# Altium PCB Pannelisation_janvier2018.PcbDoc (part 2 of 3)
Units mil, origin at the board's own origin, x right, y up, seen from the top; angles counter-clockwise.
Board outline 6785 x 5025 mil, 2 copper layers (Top Layer, Bottom Layer); 423 components, 0 nets, 1281 pads, 340 vias.
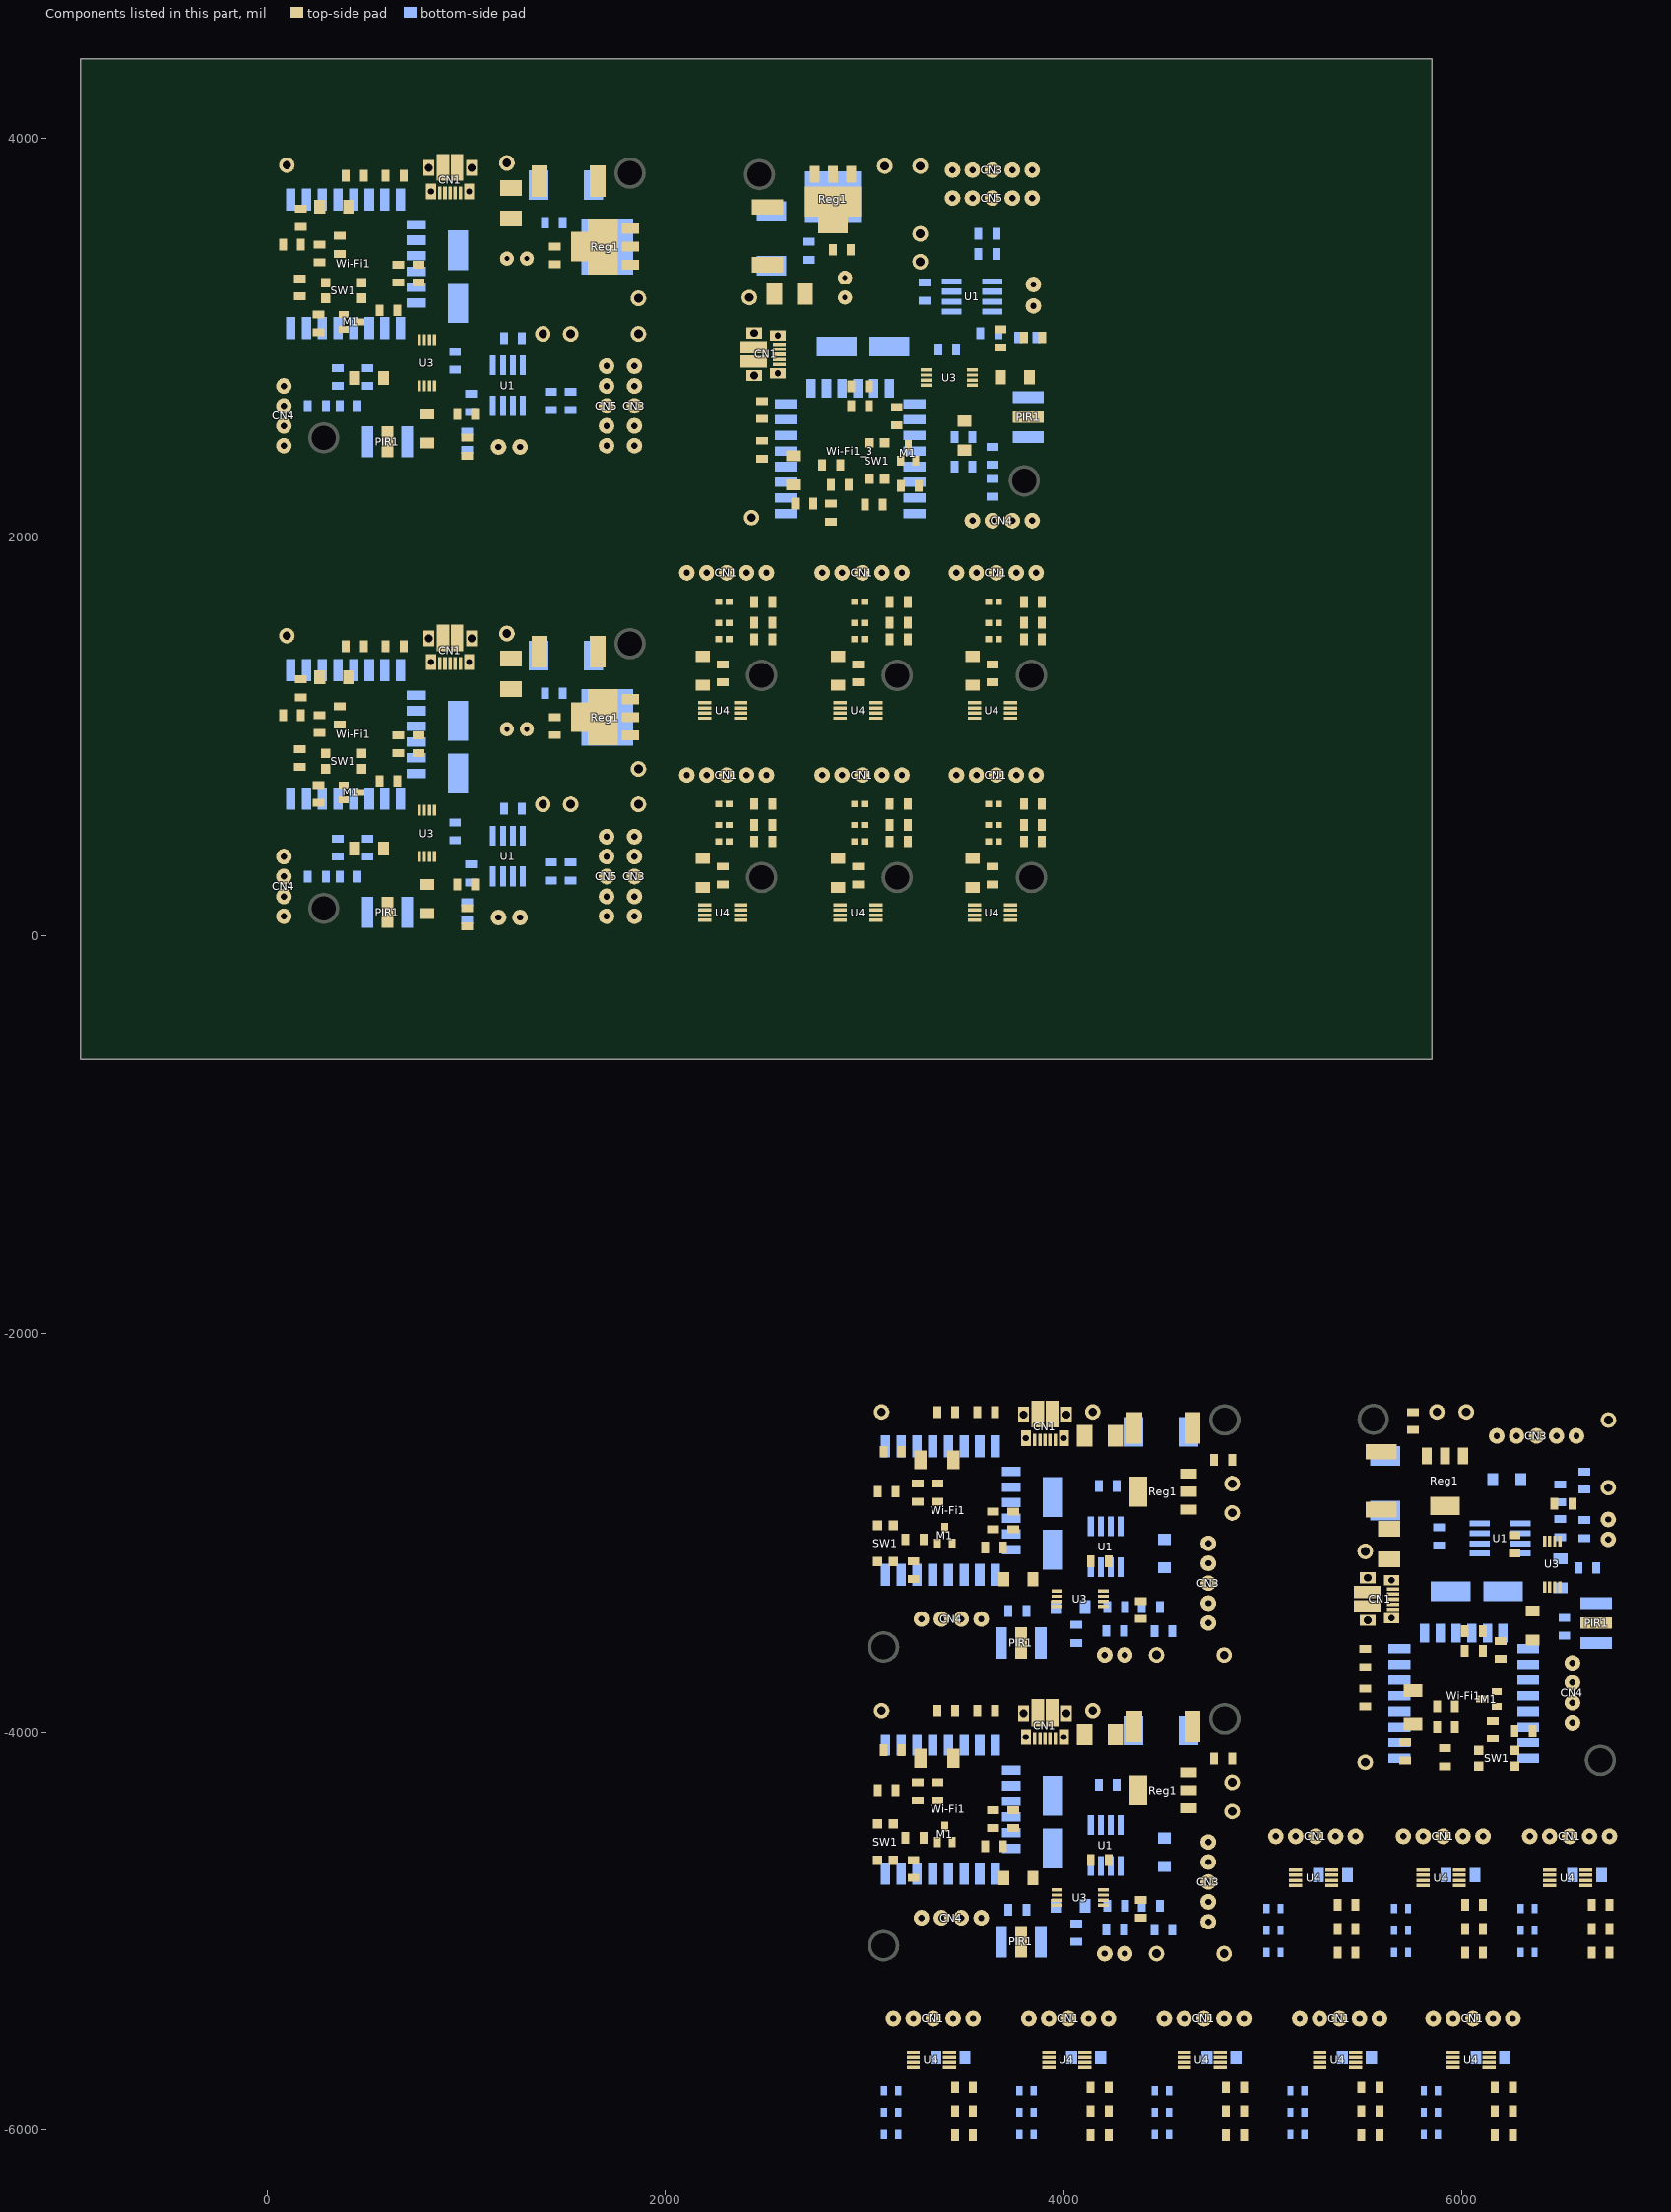
[diagram p2: the components of this part, seen from the top]

## Via types
v1: diameter 40, hole 18, Top Layer to Bottom Layer, 167 vias
v2: diameter 50, hole 24, Top Layer to Bottom Layer, 107 vias
v3: diameter 39.37, hole 15.75, Top Layer to Bottom Layer, 48 vias
v4: diameter 60, hole 32, Top Layer to Bottom Layer, 18 vias

## Nets (pads, with @x,y where several pads share a name; then routed paths per layer and width w, separated by ;. In a path a pad name is that pad's centre, name@x,y a point inside that pad or via, vN(x,y) a via of type N, cw(c..) or ccw(c..) an arc to the next point about the centre after c; other vN are vias at no path point) (continued)
copper on no net: | length 232859
  Top Layer w10: 170,1104 171,1105 ; 170,3467 171,3468 ; 486,1442 486,1452 486,1462 ; 486,3805 486,3815 486,3825 ; 1333.2,1388.54 1368.66,1424 ; 1333.2,3751.54 1368.66,3787 ; 1660,1424 1662.09,1421.91 ; 1660,3787 1662.09,3784.91 ; 2475,2483 2485,2483 2495,2483 ; 2513,3365.66 2548.46,3330.2 ; 2513,3657 2515.09,3659.09 ; 2832,2168 2833,2167 ; 3244.77,-5687 3245,-5686.77 ; 3266,-4148.65 3280.65,-4134 ; 3266,-2648.65 3280.65,-2634 ; 3366,-3894 3366,-3868 ; 3366,-2394 3366,-2368 ; 3455,-5795 3455,-5785 ; 3456,-3904 3456,-3894 3456,-3884 ; 3456,-2404 3456,-2394 3456,-2384 ; 3535,-6025 3535,-6020 ; 3924.77,-5687 3925,-5686.77 ; 4135,-5795 4135,-5785 ; 4215,-6025 4215,-6020 ; 4604.77,-5687 4605,-5686.77 ; 4646,-3974 4648.09,-3976.09 ; 4646,-2474 4648.09,-2476.09 ; 4815,-5795 4815,-5785 ; 4895,-6025 4895,-6020 ; 5164.77,-4772 5165,-4771.77 ; 5284.77,-5687 5285,-5686.77 ; 5375,-4880 5375,-4870 ; 5455,-5110 5455,-5105 ; 5488,-3874 5514,-3874 ; 5495,-5795 5495,-5785 ; 5504,-3784 5514,-3784 5524,-3784 ; 5575,-6025 5575,-6020 ; 5594,-2594 5596.09,-2591.91 ; 5754,-3959.35 5768.65,-3974 ; 5804.77,-4772 5805,-4771.77 ; 5954.77,-5687 5955,-5686.77 ; 6015,-4880 6015,-4870 ; 6095,-5110 6095,-5105 ; 6165,-5795 6165,-5785 ; 6245,-6025 6245,-6020 ; 6439.77,-4772 6440,-4771.77 ; 6650,-4880 6650,-4870 ; 6730,-5110 6730,-5105
  Top Layer w15: 582,992 582,871 610,843 610,723.12 630.12,703 743,703 765,681 765,627.28 ; 582,3355 582,3234 610,3206 610,3086.12 630.12,3066 743,3066 765,3044 765,2990.28 ; 790.59,395 790.59,343.41 811,323 v1(897,323) ; 790.59,627.28 790.59,693.59 818,721 983,721 1018,686 1086,686 1118,718 1118,791 ; 790.59,2758 790.59,2706.41 811,2686 v1(897,2686) ; 790.59,2990.28 790.59,3056.59 818,3084 983,3084 1018,3049 1086,3049 1118,3081 1118,3154 ; 816.18,395 v1@816.18,476.18 ; 816.18,2758 v1@816.18,2839.18 ; 955,255 955,265 ; 955,2618 955,2628 ; v2(2081,41) 2141,41 2175.23,75.23 2198,75.23 ; v2(2081,1056) 2141,1056 2175.23,1090.23 2198,1090.23 ; 2108,805 2108,709 2058,659 2058,146 2103.18,100.82 2198,100.82 ; 2108,1820 2108,1724 2058,1674 2058,1161 2103.18,1115.82 2198,1115.82 ; 2146.62,153.56 2126,174.19 2126,603 2149,626 v1(2184,626) ; 2146.62,1168.56 2126,1189.19 2126,1618 2149,1641 v1(2184,1641) ; 2148,152 2198,152 ; 2148,1167 2198,1167 ; 2198,126.41 2126.59,126.41 2092,161 2092,628 2197,733 2236,733 2308,805 ; 2198,1141.41 2126.59,1141.41 2092,1176 2092,1643 2197,1748 2236,1748 2308,1820 ; v1(2287,200) 2287,94 2305.77,75.23 2379.1,75.23 ; v1(2287,404) 2320.67,437.67 2320.67,471 ; v1(2287,1215) 2287,1109 2305.77,1090.23 2379.1,1090.23 ; v1(2287,1419) 2320.67,1452.67 2320.67,1486 ; 2379.1,100.82 2424.18,100.82 v1(2465,60) ; 2379.1,126.41 2486.59,126.41 v1(2505,108) ; 2379.1,1115.82 2424.18,1115.82 v1(2465,1075) ; 2379.1,1141.41 2486.59,1141.41 v1(2505,1123) ; v2(2761,41) 2821,41 2855.23,75.23 2878,75.23 ; v2(2761,1056) 2821,1056 2855.23,1090.23 2878,1090.23 ; 2788,805 2788,709 2738,659 2738,146 2783.18,100.82 2878,100.82 ; 2788,1820 2788,1724 2738,1674 2738,1161 2783.18,1115.82 2878,1115.82 ; 2826.62,153.56 2806,174.19 2806,603 2829,626 v1(2864,626) ; 2826.62,1168.56 2806,1189.19 2806,1618 2829,1641 v1(2864,1641) ; 2828,152 2878,152 ; 2828,1167 2878,1167 ; 2878,126.41 2806.59,126.41 2772,161 2772,628 2877,733 2916,733 2988,805 ; 2878,1141.41 2806.59,1141.41 2772,1176 2772,1643 2877,1748 2916,1748 2988,1820 ; 2945,2579 3066,2579 3094,2607 3213.88,2607 3234,2627.12 3234,2740 3256,2762 3309.72,2762 ; v1(2967,200) 2967,94 2985.77,75.23 3059.1,75.23 ; v1(2967,404) 3000.67,437.67 3000.67,471 ; v1(2967,1215) 2967,1109 2985.77,1090.23 3059.1,1090.23 ; v1(2967,1419) 3000.67,1452.67 3000.67,1486 ; 3059.1,100.82 3104.18,100.82 v1(3145,60) ; 3059.1,126.41 3166.59,126.41 v1(3185,108) ; 3059.1,1115.82 3104.18,1115.82 v1(3145,1075) ; 3059.1,1141.41 3166.59,1141.41 v1(3185,1123) ; v2(3099,-5687) 3244.77,-5687 ; 3145,-5440 3145,-5625 3181.18,-5661.18 3245,-5661.18 ; 3146,3115 3219,3115 3251,3083 3251,3015 3216,2980 3216,2815 3243.41,2787.59 3309.72,2787.59 ; 3161,-4299 3321,-4299 3366,-4254 ; 3161,-2799 3321,-2799 3366,-2754 ; 3245,-5635.59 3319.41,-5635.59 3345,-5610 3345,-5440 ; v1(3370,-5840) 3330,-5800 3330,-5695 3363.82,-5661.18 3426.1,-5661.18 ; v1(3385,-5760) 3385,-5705 3400,-5690 ; 3426.1,-5635.59 3480.59,-5635.59 3500,-5655 3500,-5850 3455,-5895 ; 3426.1,-5610 3533,-5610 ; v2(3435,41) 3495,41 3529.23,75.23 3552,75.23 ; v2(3435,1056) 3495,1056 3529.23,1090.23 3552,1090.23 ; 3446,-4134 3446,-4121 ; 3446,-2634 3446,-2621 ; v1@3460.82,2813.18 3542,2813.18 ; 3462,805 3462,709 3412,659 3412,146 3457.18,100.82 3552,100.82 ; 3462,1820 3462,1724 3412,1674 3412,1161 3457.18,1115.82 3552,1115.82 ; 3500.62,153.56 3480,174.19 3480,603 3503,626 v1(3538,626) ; 3500.62,1168.56 3480,1189.19 3480,1618 3503,1641 v1(3538,1641) ; 3502,152 3552,152 ; 3502,1167 3552,1167 ; 3542,2787.59 3593.59,2787.59 3614,2808 v1(3614,2894) ; 3552,126.41 3480.59,126.41 3446,161 3446,628 3551,733 3590,733 3662,805 ; 3552,1141.41 3480.59,1141.41 3446,1176 3446,1643 3551,1748 3590,1748 3662,1820 ; v1(3641,200) 3641,94 3659.77,75.23 3733.1,75.23 ; v1(3641,404) 3674.67,437.67 3674.67,471 ; v1(3641,1215) 3641,1109 3659.77,1090.23 3733.1,1090.23 ; v1(3641,1419) 3674.67,1452.67 3674.67,1486 ; 3672,2952 3682,2952 ; 3733.1,100.82 3778.18,100.82 v1(3819,60) ; 3733.1,126.41 3840.59,126.41 v1(3859,108) ; 3733.1,1115.82 3778.18,1115.82 v1(3819,1075) ; 3733.1,1141.41 3840.59,1141.41 v1(3859,1123) ; v2(3779,-5687) 3924.77,-5687 ; 3825,-5440 3825,-5625 3861.18,-5661.18 3925,-5661.18 ; v1@3898.59,-4819.59 3966,-4819.59 ; v1@3898.59,-3319.59 3966,-3319.59 ; 3925,-5635.59 3999.41,-5635.59 4025,-5610 4025,-5440 ; 3966,-4845.18 4058,-4845.18 ; 3966,-3345.18 4058,-3345.18 ; v1(4050,-5840) 4010,-5800 4010,-5695 4043.82,-5661.18 4106.1,-5661.18 ; v1(4058,-4638) 4130,-4638 ; v1(4058,-3138) 4130,-3138 ; v1(4065,-5760) 4065,-5705 4080,-5690 ; 4106.1,-5635.59 4160.59,-5635.59 4180,-5655 4180,-5850 4135,-5895 ; 4106.1,-5610 4213,-5610 ; v1@4151,-4941 v1@4156,-4936 ; v1@4151,-3441 v1@4156,-3436 ; v1@4160,-4932 v1@4156,-4936 ; v1@4160,-3432 v1@4156,-3436 ; v1@4161.5,-4941.5 v1@4156,-4936 ; v1@4161.5,-3441.5 v1@4156,-3436 ; v1(4162,-4941) 4120,-4899 4120,-4867 4141.82,-4845.18 4198.28,-4845.18 ; v1(4162,-3441) 4120,-3399 4120,-3367 4141.82,-3345.18 4198.28,-3345.18 ; 4198.28,-4819.59 4272.41,-4819.59 4496,-4596 ; 4198.28,-4794 4251,-4794 4412,-4633 v1(4412,-4598) ; 4198.28,-3319.59 4272.41,-3319.59 4496,-3096 ; 4198.28,-3294 4251,-3294 4412,-3133 v1(4412,-3098) ; v1(4381,-4994) 4381,-4939 ; v1(4381,-3494) 4381,-3439 ; v2(4459,-5687) 4604.77,-5687 ; 4505,-5440 4505,-5625 4541.18,-5661.18 4605,-5661.18 ; 4605,-5635.59 4679.41,-5635.59 4705,-5610 4705,-5440 ; v1(4730,-5840) 4690,-5800 4690,-5695 4723.82,-5661.18 4786.1,-5661.18 ; v1(4745,-5760) 4745,-5705 4760,-5690 ; 4786.1,-5635.59 4840.59,-5635.59 4860,-5655 4860,-5850 4815,-5895 ; 4786.1,-5610 4893,-5610 ; v2(5019,-4772) 5164.77,-4772 ; 5065,-4525 5065,-4710 5101.18,-4746.18 5165,-4746.18 ; v2(5139,-5687) 5284.77,-5687 ; 5165,-4720.59 5239.41,-4720.59 5265,-4695 5265,-4525 ; 5185,-5440 5185,-5625 5221.18,-5661.18 5285,-5661.18 ; 5285,-5635.59 5359.41,-5635.59 5385,-5610 5385,-5440 ; v1(5290,-4925) 5250,-4885 5250,-4780 5283.82,-4746.18 5346.1,-4746.18 ; v1(5305,-4845) 5305,-4790 5320,-4775 ; 5346.1,-4720.59 5400.59,-4720.59 5420,-4740 5420,-4935 5375,-4980 ; 5346.1,-4695 5453,-4695 ; v1(5410,-5840) 5370,-5800 5370,-5695 5403.82,-5661.18 5466.1,-5661.18 ; v1(5425,-5760) 5425,-5705 5440,-5690 ; 5466.1,-5635.59 5520.59,-5635.59 5540,-5655 5540,-5850 5495,-5895 ; 5466.1,-5610 5573,-5610 ; v2(5659,-4772) 5804.77,-4772 ; 5705,-4525 5705,-4710 5741.18,-4746.18 5805,-4746.18 ; 5741,-3794 5754,-3794 ; 5805,-4720.59 5879.41,-4720.59 5905,-4695 5905,-4525 ; v2(5809,-5687) 5954.77,-5687 ; 5855,-5440 5855,-5625 5891.18,-5661.18 5955,-5661.18 ; 5874,-3874 5919,-3919 5919,-4079 ; v1(5930,-4925) 5890,-4885 5890,-4780 5923.82,-4746.18 5986.1,-4746.18 ; v1(5945,-4845) 5945,-4790 5960,-4775 ; 5955,-5635.59 6029.41,-5635.59 6055,-5610 6055,-5440 ; 5986.1,-4720.59 6040.59,-4720.59 6060,-4740 6060,-4935 6015,-4980 ; 5986.1,-4695 6093,-4695 ; v1(6080,-5840) 6040,-5800 6040,-5695 6073.82,-5661.18 6136.1,-5661.18 ; v1(6095,-5760) 6095,-5705 6110,-5690 ; 6136.1,-5635.59 6190.59,-5635.59 6210,-5655 6210,-5850 6165,-5895 ; 6136.1,-5610 6243,-5610 ; 6216,-2744 6439.59,-2967.59 6439.59,-3041.72 ; v1(6218,-2828) 6253,-2828 6414,-2989 6414,-3041.72 ; v1(6258,-3182) 6258,-3110 ; v2(6294,-4772) 6439.77,-4772 ; 6340,-4525 6340,-4710 6376.18,-4746.18 6440,-4746.18 ; v1@6439.59,-3341.41 6439.59,-3274 ; 6440,-4720.59 6514.41,-4720.59 6540,-4695 6540,-4525 ; 6465.18,-3274 6465.18,-3182 ; 6465.18,-3041.72 6465.18,-3098.18 6487,-3120 6519,-3120 v1(6561,-3078) ; v1@6552,-3080 v1@6556,-3084 ; 6559,-2859 v1(6614,-2859) ; v1@6561,-3089 v1@6556,-3084 ; v1@6561.5,-3078.5 v1@6556,-3084 ; v1(6565,-4925) 6525,-4885 6525,-4780 6558.82,-4746.18 6621.1,-4746.18 ; v1(6580,-4845) 6580,-4790 6595,-4775 ; 6621.1,-4720.59 6675.59,-4720.59 6695,-4740 6695,-4935 6650,-4980 ; 6621.1,-4695 6728,-4695
  Top Layer w18: 868.82,1364 868.82,1478.17 ; 868.82,3727 868.82,3841.17 ; 2458.83,2865.82 2573,2865.82 ; 3957.18,-4034 3957.18,-4088.18 v2(4050,-4181) ; 3957.18,-2534 3957.18,-2588.18 v2(4050,-2681) ; 5654,-3282.82 5708.18,-3282.82 v2(5801,-3190)
  Top Layer w20: v1(80,1209) 80,1251 114,1285 170,1285 ; v1(80,3572) 80,3614 114,3648 170,3648 ; 165,845 285.08,845 ; 165,3208 285.08,3208 ; 170,1104 170,1195 ; 170,3467 170,3558 ; 171,1105 265,1105 427,1105 478,1156 827,1156 1121,862 1342,862 v1(1377,897) ; 171,3468 265,3468 427,3468 478,3519 827,3519 1121,3225 1342,3225 v1(1377,3260) ; 259.45,753.45 260,754 261,755 385,755 ; 259.45,3116.45 260,3117 261,3118 385,3118 ; v1(260,584) 260,664 ; v1(260,2947) 260,3027 ; 463.74,717.6 507.6,717.6 565,775 ; 463.74,3080.6 507.6,3080.6 565,3138 ; v1(539,1044) 574,1079 760,1079 ; v1(539,3407) 574,3442 760,3442 ; 585,435 670,435 711,394 757,394 ; 585,2798 670,2798 711,2757 757,2757 ; v1(592,1219) 615,1196 842,1196 1053,985 v1(1093,985) ; v1(592,3582) 615,3559 842,3559 1053,3348 v1(1093,3348) ; 660,1004 594,1004 582,992 521,992 v1(469,1044) 542,1117 810,1117 1100,827 v1(1388,827) ; 660,3367 594,3367 582,3355 521,3355 v1(469,3407) 542,3480 810,3480 1100,3190 v1(1388,3190) ; 760,1004 760,1079 ; 760,3367 760,3442 ; 805,255 870,255 899,226 899,153 963,89 1156,89 ; 805,2618 870,2618 899,2589 899,2516 963,2452 1156,2452 ; 805.33,109 v1(875,109) ; 805.33,2472 v1(875,2472) ; v1@816.18,476.18 v1(817,477) ; v1@816.18,2839.18 v1(817,2840) ; v1(897,323) 955,265 ; v1(897,2686) 955,2628 ; 955,255 955,185 1005,135 ; 955,2618 955,2548 1005,2498 ; 971.18,1364 971.18,1255.82 1010,1217 v2(1064,1217) ; 971.18,3727 971.18,3618.82 1010,3580 v2(1064,3580) ; v1(1084,585) 1313,585 1385,657 ; v1(1084,2948) 1313,2948 1385,3020 ; v1(1377.17,769.83) 1356,791 1082,791 794,1079 760,1079 ; v1(1377.17,3132.83) 1356,3154 1082,3154 794,3442 760,3442 ; v2(2186,487) 2186,526 2213.73,553.73 2250.07,553.73 ; v2(2186,1502) 2186,1541 2213.73,1568.73 2250.07,1568.73 ; 2188,385.67 2228.67,345 2288,345 ; 2188,1400.67 2228.67,1360 2288,1360 ; 2203,255 2288,255 ; 2203,1270 2288,1270 ; 2269.49,471 2250.07,490.42 2250.07,553.73 ; 2269.49,1486 2250.07,1505.42 2250.07,1568.73 ; 2269.76,659 2250.07,639.32 2250.07,553.73 ; 2269.76,1674 2250.07,1654.32 2250.07,1568.73 ; 2320.67,471 2446,471 ; 2320.67,1486 2446,1486 ; 2320.94,553.73 2446.73,553.73 ; 2320.94,659 2380,659 ; 2320.94,1568.73 2446.73,1568.73 ; 2320.94,1674 2380,1674 ; 2380,554.73 v1(2380,598) ; 2380,1569.73 v1(2380,1613) ; 2447,659 2380,659 ; 2447,1674 2380,1674 ; v1(2467,731) 2396,731 2380,715 2380,659 ; v1(2467,1746) 2396,1746 2380,1730 2380,1674 ; 2573,2968.18 2681.18,2968.18 2720,3007 v2(2720,3061) ; 2652,2167 2652,2111 2686,2077 v1(2728,2077) ; v1(2718,2589) 2741,2612 2741,2839 2952,3050 v1(2952,3090) ; 2742,2167 2833,2167 ; 2832,2168 2832,2262 2832,2424 2781,2475 2781,2824 3075,3118 3075,3339 v1(3040,3374) ; v2(2866,487) 2866,526 2893.73,553.73 2930.07,553.73 ; v2(2866,1502) 2866,1541 2893.73,1568.73 2930.07,1568.73 ; 2868,385.67 2908.67,345 2968,345 ; 2868,1400.67 2908.67,1360 2968,1360 ; 2883,255 2968,255 ; 2883,1270 2968,1270 ; v1(2893,2536) 2858,2571 2858,2757 ; 2933,2657 2933,2591 2945,2579 2945,2518 v1(2893,2466) 2820,2539 2820,2807 3110,3097 v1(3110,3385) ; 2933,2757 2858,2757 ; 2949.49,471 2930.07,490.42 2930.07,553.73 ; 2949.49,1486 2930.07,1505.42 2930.07,1568.73 ; 2949.76,659 2930.07,639.32 2930.07,553.73 ; 2949.76,1674 2930.07,1654.32 2930.07,1568.73 ; 3000.67,471 3126,471 ; 3000.67,1486 3126,1486 ; 3000.94,553.73 3126.73,553.73 ; 3000.94,659 3060,659 ; 3000.94,1568.73 3126.73,1568.73 ; 3000.94,1674 3060,1674 ; 3060,554.73 v1(3060,598) ; 3060,1569.73 v1(3060,1613) ; v1(3066,-4189) 3066,-4135 3093,-4108 ; v1(3066,-2689) 3066,-2635 3093,-2608 ; 3066.63,-4463.45 3066.63,-4390.37 3080,-4377 3233,-4377 3266,-4344 3366,-4344 ; 3066.63,-2963.45 3066.63,-2890.37 3080,-2877 3233,-2877 3266,-2844 3366,-2844 ; 3092,2162 3092,2282.08 ; 3127,659 3060,659 ; 3127,1674 3060,1674 ; 3145.37,-4644.55 3245.45,-4644.55 3246,-4644 ; 3145.37,-3144.55 3245.45,-3144.55 3246,-3144 ; v1(3147,731) 3076,731 3060,715 3060,659 ; v1(3147,1746) 3076,1746 3060,1730 3060,1674 ; 3156,-4274 3156,-4136 3192,-4100 ; 3156,-2774 3156,-2636 3192,-2600 ; 3162,2562 3219.4,2504.6 3219.4,2460.74 ; v1(3167.17,3374.17) 3146,3353 3146,3079 2858,2791 2858,2757 ; 3182,2382 3182,2258 3183,2257 3183.55,2256.45 ; 3245,-5605 3245,-5440 ; v1(3246,-4814) 3246,-4734 ; v1(3246,-3314) 3246,-3234 ; 3260,-4643 3296,-4607 ; 3260,-3143 3296,-3107 ; v1(3265,-5802) 3265,-5965 3325,-6025 3445,-6025 ; 3273,2257 v1(3353,2257) ; 3280,3382 3352,3310 v1(3352,3081) ; 3296,-4534 3296,-4607 ; 3296,-3034 3296,-3107 ; 3366,-4254 3479,-4254 3500,-4233 3842,-4233 4079,-4470 4562,-4470 4646,-4554 4726,-4554 ; 3366,-2754 3479,-2754 3500,-2733 3842,-2733 4079,-2970 4562,-2970 4646,-3054 4726,-3054 ; v1(3370,-5965) 3370,-5920 3385,-5905 3455,-5905 3455,-5895 ; v1(3370,-5840) 3410,-5840 3455,-5795 ; 3371,-4559 3323,-4607 3296,-4607 ; 3371,-3059 3323,-3107 3296,-3107 ; 3404,-4478 3411,-4485 3454,-4485 3464.26,-4495.26 3536.26,-4495.26 3606,-4565 3606,-4574 ; 3404,-2978 3411,-2985 3454,-2985 3464.26,-2995.26 3536.26,-2995.26 3606,-3065 3606,-3074 ; 3456,-3904 3515,-3963 3599,-3963 3650,-3912 ; 3456,-2404 3515,-2463 3599,-2463 3650,-2412 ; v1(3460,2814) v1@3460.82,2813.18 ; 3502,2582 3502,2667 3543,2708 3543,2754 ; v1(3525,-4354) 3560,-4319 3746,-4319 ; v1(3525,-2854) 3560,-2819 3746,-2819 ; v1@3538,-4616 v1(3538,-4615) ; v1@3538,-3116 v1(3538,-3115) ; v1@3539,-4617 3570,-4648 3747,-4648 3769,-4670 3769,-4877 3786,-4894 v4(3786,-4994) ; v1@3539,-3117 3570,-3148 3747,-3148 3769,-3170 3769,-3377 3786,-3394 v4(3786,-3494) ; v2(3540,487) 3540,526 3567.73,553.73 3604.07,553.73 ; v2(3540,1502) 3540,1541 3567.73,1568.73 3604.07,1568.73 ; 3542,385.67 3582.67,345 3642,345 ; 3542,1400.67 3582.67,1360 3642,1360 ; 3543,-5783 3545,-5785 ; 3543,-5442 3545,-5440 ; 3557,255 3642,255 ; 3557,1270 3642,1270 ; v1(3578,-4179) 3867,-4179 4043,-4355 v1(4200,-4355) ; v1(3578,-2679) 3867,-2679 4043,-2855 v1(4200,-2855) ; v1(3614,2894) 3672,2952 ; 3623.49,471 3604.07,490.42 3604.07,553.73 ; 3623.49,1486 3604.07,1505.42 3604.07,1568.73 ; 3623.76,659 3604.07,639.32 3604.07,553.73 ; 3623.76,1674 3604.07,1654.32 3604.07,1568.73 ; 3646,-4394 3580,-4394 3568,-4406 3507,-4406 v1(3455,-4354) 3533,-4276 3820,-4276 4056,-4512 4504,-4512 4646,-4654 4726,-4654 ; 3646,-2894 3580,-2894 3568,-2906 3507,-2906 v1(3455,-2854) 3533,-2776 3820,-2776 4056,-3012 4504,-3012 4646,-3154 4726,-3154 ; 3668.83,-3906.83 3798.72,-3906.83 ; 3668.83,-2406.83 3798.72,-2406.83 ; 3674.67,471 3800,471 ; 3674.67,1486 3800,1486 ; 3674.94,553.73 3800.73,553.73 ; 3674.94,659 3734,659 ; 3674.94,1568.73 3800.73,1568.73 ; 3674.94,1674 3734,1674 ; 3682,2802 3682,2867 3711,2896 3784,2896 3848,2960 3848,3153 ; 3682,2952 3752,2952 3802,3002 ; 3696,-4574 3776,-4574 v2(3841,-4639) ; 3696,-3074 3776,-3074 v2(3841,-3139) ; 3734,554.73 v1(3734,598) ; 3734,1569.73 v1(3734,1613) ; 3746,-4394 3746,-4319 ; 3746,-2894 3746,-2819 ; 3801,659 3734,659 ; 3801,1674 3734,1674 ; v1(3821,731) 3750,731 3734,715 3734,659 ; v1(3821,1746) 3750,1746 3734,1730 3734,1674 ; 3828,2802.33 v1(3828,2872) ; 3846,-4734 3941,-4734 3966,-4759 3966,-4789 ; 3846,-3234 3941,-3234 3966,-3259 3966,-3289 ; 3925,-5605 3925,-5440 ; v1(3945,-5802) 3945,-5965 4005,-6025 4125,-6025 ; v1(4050,-5965) 4050,-5920 4065,-5905 4135,-5905 4135,-5895 ; v1(4050,-5840) 4090,-5840 4135,-5795 ; v1(4058,-4638) 4058,-4845.18 4058,-4956 v1(4133,-5031) ; v1(4058,-3138) 4058,-3345.18 4058,-3456 v1(4133,-3531) ; 4223,-5783 4225,-5785 ; 4223,-5442 4225,-5440 ; 4605,-5605 4605,-5440 ; v1(4625,-5802) 4625,-5965 4685,-6025 4805,-6025 ; 4726,-4754 4654,-4754 4451,-4551 4028,-4551 3796,-4319 3746,-4319 ; 4726,-3254 4654,-3254 4451,-3051 4028,-3051 3796,-2819 3746,-2819 ; v1(4730,-5965) 4730,-5920 4745,-5905 4815,-5905 4815,-5895 ; v1(4730,-5840) 4770,-5840 4815,-5795 ; 4903,-5783 4905,-5785 ; 4903,-5442 4905,-5440 ; 5165,-4690 5165,-4525 ; v1(5185,-4887) 5185,-5050 5245,-5110 5365,-5110 ; 5285,-5605 5285,-5440 ; v1(5290,-5050) 5290,-5005 5305,-4990 5375,-4990 5375,-4980 ; v1(5290,-4925) 5330,-4925 5375,-4880 ; v1(5305,-5802) 5305,-5965 5365,-6025 5485,-6025 ; v1(5410,-5965) 5410,-5920 5425,-5905 5495,-5905 5495,-5895 ; v1(5410,-5840) 5450,-5840 5495,-5795 ; 5463,-4868 5465,-4870 ; 5463,-4527 5465,-4525 ; 5524,-3784 5583,-3725 5583,-3641 5532,-3590 ; 5526.83,-3571.17 5526.83,-3441.28 ; 5583,-5783 5585,-5785 ; 5583,-5442 5585,-5440 ; 5720,-4048 5756,-4084 5894,-4084 ; 5728,-4147 5755,-4174 v1(5809,-4174) ; v1(5799,-3662) 5799,-3373 5975,-3197 v1(5975,-3040) ; 5805,-4690 5805,-4525 ; v1(5825,-4887) 5825,-5050 5885,-5110 6005,-5110 ; 5874,-3874 5874,-3761 5853,-3740 5853,-3398 6090,-3161 6090,-2678 6174,-2594 6174,-2514 ; v1(5930,-5050) 5930,-5005 5945,-4990 6015,-4990 6015,-4980 ; v1(5930,-4925) 5970,-4925 6015,-4880 ; 5955,-5605 5955,-5440 ; 5964,-3874 5964,-3974 5997,-4007 5997,-4160 6010.37,-4173.37 6083.45,-4173.37 ; v1(5974,-3715) 5939,-3680 5939,-3494 ; v1(5975,-5802) 5975,-5965 6035,-6025 6155,-6025 ; 6014,-3594 6014,-3660 6026,-3672 6026,-3733 v1(5974,-3785) 5896,-3707 5896,-3420 6132,-3184 6132,-2736 6274,-2594 6274,-2514 ; 6014,-3494 5939,-3494 ; v1(6080,-5965) 6080,-5920 6095,-5905 6165,-5905 6165,-5895 ; v1(6080,-5840) 6120,-5840 6165,-5795 ; 6098,-3836 6105,-3829 6105,-3786 6115.26,-3775.74 6115.26,-3703.74 6185,-3634 6194,-3634 ; 6103,-4868 6105,-4870 ; 6103,-4527 6105,-4525 ; 6154,-3944 6227,-3944 ; 6179,-3869 6227,-3917 6227,-3944 ; 6194,-3544 6194,-3464 v2(6259,-3399) ; v1(6235,-3702) v1@6236,-3702 ; v1@6237,-3701 6268,-3670 6268,-3493 6290,-3471 6497,-3471 6514,-3454 v4(6614,-3454) ; 6253,-5783 6255,-5785 ; 6253,-5442 6255,-5440 ; v1(6258,-3182) 6465.18,-3182 6576,-3182 v1(6651,-3107) ; 6263,-3980 6227,-3944 ; 6264,-3994 6264.55,-3994.55 6264.55,-4094.63 ; 6354,-3994 v1(6434,-3994) ; 6354,-3394 6354,-3299 6379,-3274 6409,-3274 ; 6374,-2514 6374,-2586 6171,-2789 6171,-3212 5939,-3444 5939,-3494 ; 6440,-4690 6440,-4525 ; v1(6460,-4887) 6460,-5050 6520,-5110 6640,-5110 ; v1(6565,-5050) 6565,-5005 6580,-4990 6650,-4990 6650,-4980 ; v1(6565,-4925) 6605,-4925 6650,-4880 ; 6738,-4868 6740,-4870 ; 6738,-4527 6740,-4525
  Top Layer w25: 260,754 260,801.18 294.45,835.63 ; 260,3117 260,3164.18 294.45,3198.63 ; 265,1015 277,1015 303,989 v2(381,989) ; 265,3378 277,3378 303,3352 v2(381,3352) ; 381,1053 v2(381,989) ; 381,3416 v2(381,3352) ; v1(419,215) 469,215 538,284 538,388 585,435 ; v1(419,2578) 469,2578 538,2647 538,2751 585,2798 ; 475.55,914.37 398.63,914.37 381,932 v2(381,989) ; 475.55,3277.37 398.63,3277.37 381,3295 v2(381,3352) ; 486,1442 486,1403 504,1385 663,1385 686,1408 686,1452 731,1452 770.17,1491.17 812.72,1491.17 ; 486,3805 486,3766 504,3748 663,3748 686,3771 686,3815 731,3815 770.17,3854.17 812.72,3854.17 ; 538,288 631,288 705,214 v4(705,75) 738,42 981,42 ; 538,2651 631,2651 705,2577 v4(705,2438) 738,2405 981,2405 ; v1(588,336) 656,336 737,255 805,255 ; v1(588,2699) 656,2699 737,2618 805,2618 ; 660,914 760,914 829,914 v2(857,942) ; 660,3277 760,3277 829,3277 v2(857,3305) ; 1205,1515 1145,1515 1120,1490 1120,1273 v2(1064,1217) 1207,1217 1225,1235 ; 1205,3878 1145,3878 1120,3853 1120,3636 v2(1064,3580) 1207,3580 1225,3598 ; 1445,1095 1573.03,1095 ; 1445,3458 1573.03,3458 ; 1705,195 1845,195 ; 1705,295 1845,295 ; 1705,395 1845,395 ; 1705,495 1845,495 ; 1705,2558 1845,2558 ; 1705,2658 1845,2658 ; 1705,2758 1845,2758 ; 1705,2858 1845,2858 ; 2186,387.67 v2(2186,487) ; 2186,1402.67 v2(2186,1502) ; 2188,240 2203,255 ; 2188,1255 2203,1270 ; 2288,255 2363,255 ; 2288,1270 2363,1270 ; 2365,160 2365,343 2424,402 2478,402 2537,461 ; 2365,1175 2365,1358 2424,1417 2478,1417 2537,1476 ; 2422,3202 2422,3142 2447,3117 2664,3117 v2(2720,3061) 2720,3204 2702,3222 ; 2445.83,2809.72 2445.83,2767.17 2485,2728 2485,2683 2529,2683 2552,2660 2552,2501 2534,2483 2495,2483 ; 2508,805 2508,751 2537,722 2537,659 2537,554 2537,471 ; 2508,1820 2508,1766 2537,1737 2537,1674 2537,1569 2537,1486 ; 2536,457 2536,471 ; 2536,1472 2536,1486 ; 2842,3442 2842,3570.03 ; 2866,387.67 v2(2866,487) ; 2866,1402.67 v2(2866,1502) ; 2868,240 2883,255 ; 2868,1255 2883,1270 ; 2884,2378 v2(2948,2378) ; 2922,2262 2922,2274 2948,2300 v2(2948,2378) ; 2968,255 3043,255 ; 2968,1270 3043,1270 ; v2(2995,2854) 3023,2826 3023,2757 3023,2657 ; 3022.63,2472.55 3022.63,2395.63 3005,2378 v2(2948,2378) ; 3045,160 3045,343 3104,402 3158,402 3217,461 ; 3045,1175 3045,1358 3104,1417 3158,1417 3217,1476 ; 3101.37,2291.45 3135.82,2257 3183,2257 ; 3188,805 3188,751 3217,722 3217,659 3217,554 3217,471 ; 3188,1820 3188,1766 3217,1737 3217,1674 3217,1569 3217,1486 ; v2(3199,-3941) 3272,-4014 3339,-4014 3446,-4121 ; v2(3199,-2441) 3272,-2514 3339,-2514 3446,-2621 ; 3216,457 3216,471 ; 3216,1472 3216,1486 ; 3266,-4254 3266,-4148.65 ; 3266,-2754 3266,-2648.65 ; 3442,3702 3442,3842 ; 3502,2582 3549,2535 3653,2535 3722,2466 v1(3722,2416) ; 3540,387.67 v2(3540,487) ; 3540,1402.67 v2(3540,1502) ; 3542,240 3557,255 ; 3542,1255 3557,1270 ; 3542,3702 3542,3842 ; 3543,-5783 3543,-5442 ; 3545,-6025 3545,-5905 3545,-5785 ; v1(3601,2585) 3601,2653 3682,2734 3682,2802 ; 3642,255 3717,255 ; 3642,1270 3717,1270 ; 3642,3702 3642,3842 ; 3646,-4484 3746,-4484 3808,-4484 3903,-4579 3903,-4677 3846,-4734 3846,-4901 3888,-4943 v4(3888,-5110) ; 3646,-2984 3746,-2984 3808,-2984 3903,-3079 3903,-3177 3846,-3234 3846,-3401 3888,-3443 v4(3888,-3610) ; 3649,2535 3649,2628 3723,2702 v4(3862,2702) 3895,2735 3895,2978 ; 3719,160 3719,343 3778,402 3832,402 3891,461 ; 3719,1175 3719,1358 3778,1417 3832,1417 3891,1476 ; 3742,3702 3742,3842 ; 3862,805 3862,751 3891,722 3891,659 3891,554 3891,471 ; 3862,1820 3862,1766 3891,1737 3891,1674 3891,1569 3891,1486 ; 3888,-4965 v1(3992,-4965) ; 3888,-3465 v1(3992,-3465) ; 3890,457 3890,471 ; 3890,1472 3890,1486 ; v2(4050,-4181) 4106,-4125 4106,-4014 ; v2(4050,-2681) 4106,-2625 4106,-2514 ; 4223,-5783 4223,-5442 ; 4225,-6025 4225,-5905 4225,-5785 ; 4903,-5783 4903,-5442 ; 4905,-6025 4905,-5905 4905,-5785 ; 5463,-4868 5463,-4527 ; 5465,-5110 5465,-4990 5465,-4870 ; v2(5561,-4041) 5634,-3968 5634,-3901 5741,-3794 ; 5583,-5783 5583,-5442 ; 5585,-6025 5585,-5905 5585,-5785 ; 5634,-3134 5745,-3134 v2(5801,-3190) ; 5768.65,-3974 5874,-3974 ; 6103,-4868 6103,-4527 ; 6104,-3594 6104,-3494 6104,-3432 6199,-3337 6297,-3337 6354,-3394 6521,-3394 6563,-3352 v4(6730,-3352) ; 6105,-5110 6105,-4990 6105,-4870 ; 6253,-5783 6253,-5442 ; 6255,-6025 6255,-5905 6255,-5785 ; 6585,-3352 v1(6585,-3248) ; 6738,-4868 6738,-4527 ; 6740,-5110 6740,-4990 6740,-4870
  Top Layer w30: v2(265,1192) 265,1295 ; v2(265,3555) 265,3658 ; 655,775 1015,775 v2(1055,735) ; 655,3138 1015,3138 v2(1055,3098) ; 2642,2262 v2(2745,2262) ; 3162,2652 3162,3012 v2(3202,3052) ; 3366,-4344 3367,-4345 v2(3367,-4409) 3436,-4409 3476,-4449 3562,-4449 3597,-4484 3646,-4484 ; 3366,-2844 3367,-2845 v2(3367,-2909) 3436,-2909 3476,-2949 3562,-2949 3597,-2984 3646,-2984 ; 5964,-3874 5965,-3873 v2(6029,-3873) 6029,-3804 6069,-3764 6069,-3678 6104,-3643 6104,-3594
  Top Layer w40: 585,454 v2(655,524) ; 585,2817 v2(655,2887) ; 805,109.33 805.33,109 ; 805,2472.33 805.33,2472 ; 1225,1388.54 1333.2,1388.54 ; 1225,3751.54 1333.2,3751.54 ; v2(1540,1423) 1659,1423 ; v2(1540,3786) 1659,3786 ; 1640,1404 1659,1423 ; 1640,3767 1659,3786 ; 1660,1424 1659,1423 ; 1660,3787 1659,3786 ; 1680,1367 1722,1367 1825,1264 1825,1185.55 ; 1680,3730 1722,3730 1825,3627 1825,3548.55 ; v3@1740,1042 1687,1095 1825,1095 ; v3@1740,3405 1687,3458 1825,3458 ; 1845,95 1632,95 1597,130 1597,544 1648,595 1803,595 1865,657 ; 1845,2458 1632,2458 1597,2493 1597,2907 1648,2958 1803,2958 1865,3020 ; 2513,3657 2514,3656 ; v2(2514,3537) 2514,3656 ; 2533,3637 2514,3656 ; 2548.46,3222 2548.46,3330.2 ; 2570,3677 2570,3719 2673,3822 2751.45,3822 ; 2842,3822 2842,3684 v3@2895,3737 ; 3280,3862 3342,3800 3342,3645 3393,3594 3807,3594 3842,3629 3842,3842 ; v2(3413,2652) 3483,2582 ; 3827.67,2802 3828,2802.33 ; 4106,-4014 4106,-3934 4146,-3894 ; 4106,-2514 4106,-2434 4146,-2394 ; 4286.54,-4007 4328,-4007 ; 4286.54,-2507 4328,-2507 ; v2(4526,-3975) 4645,-3975 ; v2(4526,-2475) 4645,-2475 ; v3(4531.51,-4294) 4626,-4294 ; v3(4531.51,-2794) 4626,-2794 ; 4626,-3994 4645,-3975 ; 4626,-2494 4645,-2475 ; 4646,-4183.45 4646,-3974 4645,-3975 ; 4646,-2683.45 4646,-2474 4645,-2475 ; 4647,-4134 4756,-4134 ; 4647,-2634 4756,-2634 ; 5514,-3094 5554,-3134 5634,-3134 ; v2(5595,-2714) 5595,-2595 ; 5614,-2614 5595,-2595 ; 5627,-2953.46 5627,-2912 ; 5754,-2593 5754,-2484 ; 5803.45,-2594 5594,-2594 5595,-2595 ; v3(5914,-2708.49) 5914,-2614
  Top Layer w50: 884.57,1493.92 955.43,1493.92 ; 884.57,3856.92 955.43,3856.92 ; 2443.08,2881.57 2443.08,2952.43
  Bottom Layer w10: 356,685.98 356.22,686.2 ; 356,3048.98 356.22,3049.2 ; 812.72,1383.69 824.53,1371.87 ; 812.72,3746.69 824.53,3734.87 ; 2553.31,2809.72 2565.13,2821.53 ; 3098.07,-5801.73 3099,-5800.8 ; 3168.94,-5801.73 3170,-5800.67 ; 3250.8,2353.22 3251.02,2353 ; 3778.07,-5801.73 3779,-5800.8 ; 3798.72,-4014.31 3810.53,-4026.13 ; 3798.72,-2514.31 3810.53,-2526.13 ; 3848.94,-5801.73 3850,-5800.67 ; 4062.68,-5053.68 4082.68,-5053.68 ; 4062.68,-3553.68 4082.68,-3553.68 ; 4458.07,-5801.73 4459,-5800.8 ; 4503,-4678.73 4506,-4675.73 ; 4503,-3178.73 4506,-3175.73 ; 4528.94,-5801.73 4530,-5800.67 ; 5018.07,-4886.73 5019,-4885.8 ; 5088.94,-4886.73 5090,-4885.67 ; 5138.07,-5801.73 5139,-5800.8 ; 5208.94,-5801.73 5210,-5800.67 ; 5634.31,-3441.28 5646.13,-3429.47 ; 5658.07,-4886.73 5659,-4885.8 ; 5728.94,-4886.73 5730,-4885.67 ; 5808.07,-5801.73 5809,-5800.8 ; 5878.94,-5801.73 5880,-5800.67 ; 6293.07,-4886.73 6294,-4885.8 ; 6295.73,-2734 6298.73,-2737 ; 6363.94,-4886.73 6365,-4885.67 ; 6673.68,-3177.32 6673.68,-3157.32
  Bottom Layer w15: 960,1076 960,1113 ; 960,3439 960,3476 ; v1(2380,598) 2329,547 2329,257.28 2465,121.28 v1(2465,60) ; v1(2380,1613) 2329,1562 2329,1272.28 2465,1136.28 v1(2465,1075) ; v1(2467,731) 2467,577 2361,471 2361,264 2452,173 2489,173 2505,157 v1(2505,108) ; v1(2467,1746) 2467,1592 2361,1486 2361,1279 2452,1188 2489,1188 2505,1172 v1(2505,1123) ; 2824,2957 2861,2957 ; v1(3060,598) 3009,547 3009,257.28 3145,121.28 v1(3145,60) ; v1(3060,1613) 3009,1562 3009,1272.28 3145,1136.28 v1(3145,1075) ; v1(3147,731) 3147,577 3041,471 3041,264 3132,173 3169,173 3185,157 v1(3185,108) ; v1(3147,1746) 3147,1592 3041,1486 3041,1279 3132,1188 3169,1188 3185,1172 v1(3185,1123) ; v1(3734,598) 3683,547 3683,257.28 3819,121.28 v1(3819,60) ; v1(3734,1613) 3683,1562 3683,1272.28 3819,1136.28 v1(3819,1075) ; v1(3821,731) 3821,577 3715,471 3715,264 3806,173 3843,173 3859,157 v1(3859,108) ; v1(3821,1746) 3821,1592 3715,1486 3715,1279 3806,1188 3843,1188 3859,1172 v1(3859,1123) ; 3946,-4322 3946,-4285 ; 3946,-2822 3946,-2785 ; 3962.68,-4873.68 3945,-4891.36 3945,-5010 3988.68,-5053.68 4062.68,-5053.68 ; 3962.68,-3373.68 3945,-3391.36 3945,-3510 3988.68,-3553.68 4062.68,-3553.68 ; 4062.68,-4963.68 4069,-4970 4133,-4970 v1(4162,-4941) 4212.68,-4991.68 4212.68,-4993.68 ; 4062.68,-3463.68 4069,-3470 4133,-3470 v1(4162,-3441) 4212.68,-3491.68 4212.68,-3493.68 ; v1(4133,-5031) 4152,-5050 4402,-5050 4466,-5114 ; v1(4133,-3531) 4152,-3550 4402,-3550 4466,-3614 ; 4303,-4994 v1(4381,-4994) 4456,-4994 ; 4303,-3494 v1(4381,-3494) 4456,-3494 ; 5905,-3294 5942,-3294 ; 6493.68,-3277.32 6511.36,-3295 6630,-3295 6673.68,-3251.32 6673.68,-3177.32 ; 6583.68,-3177.32 6590,-3171 6590,-3107 v1(6561,-3078) 6611.68,-3027.32 6613.68,-3027.32 ; 6614,-2937 v1(6614,-2859) 6614,-2784 ; v1(6651,-3107) 6670,-3088 6670,-2838 6734,-2774
  Bottom Layer w20: v1(80,1209) 120,1249 120,1331.87 120,1405 135,1420 341,1420 356.22,1404.78 356.22,1331.87 ; v1(80,3572) 120,3612 120,3694.87 120,3768 135,3783 341,3783 356.22,3767.78 356.22,3694.87 ; 85,95 205,215 205,295 ; 85,295 198.74,408.74 198.74,686.2 ; 85,395 85,570 120,605 120,686.2 ; 85,2458 205,2578 205,2658 ; 85,2658 198.74,2771.74 198.74,3049.2 ; 85,2758 85,2933 120,2968 120,3049.2 ; 206,305 206,349 298,441 414,441 434.96,461.96 434.96,686.2 ; 206,2668 206,2712 298,2804 414,2804 434.96,2824.96 434.96,3049.2 ; v1(260,584) 279,603 279,684.68 277.48,686.2 ; v1(260,2947) 279,2966 279,3047.69 277.48,3049.2 ; 295,295 365,295 365,235 385,215 v1(419,215) ; 295,2658 365,2658 365,2598 385,2578 v1(419,2578) ; 356,395 505,395 629,395 660,364 660,257 v4(605,202) ; 356,485 356,685.98 ; 356,2758 505,2758 629,2758 660,2727 660,2620 v4(605,2565) ; 356,2848 356,3048.98 ; 434.96,1331.87 434.96,1156.04 469,1122 v1@469,1045 ; 434.96,3694.87 434.96,3519.04 469,3485 v1@469,3408 ; 455,295 547,295 v1(588,336) ; 455,2658 547,2658 v1(588,2699) ; 513.7,1331.87 513.7,1182.3 539,1157 v1(539,1044) ; 513.7,3694.87 513.7,3545.3 539,3520 v1(539,3407) ; v1(592,1219) 592,1331.43 592.44,1331.87 ; v1(592,3582) 592,3694.43 592.44,3694.87 ; 592.44,686.2 593,685.65 ; 592.44,3049.2 593,3048.65 ; v1(817,477) 945,477 ; v1(817,2840) 945,2840 ; v1(875,109) 909,75 1005,75 ; v1(875,2472) 909,2438 1005,2438 ; v1(897,323) 897,283 915,265 1025,265 1086,204 1167,204 1185,222 1185,295 ; v1(897,2686) 897,2646 915,2628 1025,2628 1086,2567 1167,2567 1185,2585 1185,2658 ; 963,477 986,500 1135,500 ; 963,2840 986,2863 1135,2863 ; 1005,165 1205,165 1235,195 ; 1005,2528 1205,2528 1235,2558 ; v1(1084,585) 1135,534 1135,500 ; v1(1084,2948) 1135,2897 1135,2863 ; v1(1093,985) 1093,836 1235,694 1235,500 ; v1(1093,3348) 1093,3199 1235,3057 1235,2863 ; 1139,496 1135,500 ; 1139,2859 1135,2863 ; 1185,500 1185,423 1205,403 1285,403 ; 1185,2863 1185,2786 1205,2766 1285,2766 ; 1235,295 1235,195 ; 1235,2658 1235,2558 ; 1280,635 1280,688 v2(1307,715) ; 1280,2998 1280,3051 v2(1307,3078) ; 1285,295 1285,403 ; 1285,500 1285,630 ; 1285,2658 1285,2766 ; 1285,2863 1285,2993 ; v1(1377,897) 1449,897 1469,877 1631,877 1712,796 1712,692 1845,559 1845,495 ; v1(1377,3260) 1449,3260 1469,3240 1631,3240 1712,3159 1712,3055 1845,2922 1845,2858 ; v1(1377.17,769.83) 1595.17,769.83 1631,734 1631,369 1705,295 ; v1(1377.17,3132.83) 1595.17,3132.83 1631,3097 1631,2732 1705,2658 ; v1(1388,827) 1616,827 1670,773 1670,669 1774,565 1774,466 1845,395 ; v1(1388,3190) 1616,3190 1670,3136 1670,3032 1774,2928 1774,2829 1845,2758 ; 1413,369 1379,403 1285,403 ; 1413,2732 1379,2766 1285,2766 ; 1416,277 1334,195 1235,195 ; 1416,2640 1334,2558 1235,2558 ; 1425,275 1525,275 ; 1425,365 1525,365 1525,657 ; 1425,2638 1525,2638 ; 1425,2728 1525,2728 1525,3020 ; v1(2184,626) 2208,650 2208,805 ; v1(2184,1641) 2208,1665 2208,1820 ; v1(2287,200) v1(2287,404) ; v1(2287,1215) v1(2287,1419) ; 2605.13,2353.22 2532.22,2353.22 2517,2338 2517,2132 2532,2117 2605.13,2117 2688,2117 v1(2728,2077) ; 2605.13,2431.96 2780.96,2431.96 2815,2466 v1@2892,2466 ; 2605.13,2510.7 2754.7,2510.7 2780,2536 v1(2893,2536) ; 2605.13,2589.44 2605.57,2589 v1(2718,2589) ; v1(2864,626) 2888,650 2888,805 ; v1(2864,1641) 2888,1665 2888,1820 ; v1(2952,3090) 3101,3090 3243,3232 3437,3232 ; v1(2967,200) v1(2967,404) ; v1(2967,1215) v1(2967,1419) ; v1(3040,3374) 3040,3446 3060,3466 3060,3628 3141,3709 3245,3709 3378,3842 3442,3842 ; 3106,-4711.8 3106,-4838 3202,-4934 3286,-4934 ; 3106,-4066.13 3106,-4149 v1(3066,-4189) 3318,-4189 3342.22,-4164.78 3342.22,-4066.13 ; 3106,-3211.8 3106,-3338 3202,-3434 3286,-3434 ; 3106,-2566.13 3106,-2649 v1(3066,-2689) 3318,-2689 3342.22,-2664.78 3342.22,-2566.13 ; v1(3110,3385) 3110,3613 3164,3667 3268,3667 3372,3771 3471,3771 3542,3842 ; v1(3167.17,3374.17) 3167.17,3592.17 3203,3628 3568,3628 3642,3702 ; 3168.94,-6021.73 3313.27,-6021.73 v1(3370,-5965) ; 3168.94,-5911.73 3298.27,-5911.73 v1(3370,-5840) ; 3168.94,-5801.73 3169.2,-5802 v1(3265,-5802) 3307,-5760 v1(3385,-5760) ; 3184.74,-4711.8 3184.74,-4832.74 3220,-4868 3320,-4868 3386,-4934 ; 3184.74,-3211.8 3184.74,-3332.74 3220,-3368 3320,-3368 3386,-3434 ; v2(3222,3304) 3249,3277 3302,3277 ; v1(3246,-4814) 3265,-4795 3265,-4713.32 3263.48,-4711.8 ; v1(3246,-3314) 3265,-3295 3265,-3213.32 3263.48,-3211.8 ; 3250.8,2117 3332,2117 3367,2082 3542,2082 ; 3250.8,2195.74 3528.26,2195.74 3642,2082 ; 3250.8,2274.48 3252.31,2276 3334,2276 v1(3353,2257) ; 3250.8,2431.96 3475.04,2431.96 3496,2411 3496,2295 3588,2203 3632,2203 ; 3250.8,2589.44 3251.35,2590 ; 3251.02,2353 3452,2353 ; 3280,3522 3572,3522 3572,3422 ; 3307,3282 3437,3282 ; 3342.22,-4711.8 3342.22,-4638.78 3365,-4616 3538,-4616 v1(3538,-4615) ; 3342.22,-3211.8 3342.22,-3138.78 3365,-3116 3538,-3116 v1(3538,-3115) ; v1(3352,3081) 3403,3132 3437,3132 ; 3420.96,-4711.8 3420.96,-4799.96 3486,-4865 3486,-4934 ; 3420.96,-4066.13 3420.96,-4241.96 3455,-4276 v1@3455,-4353 ; 3420.96,-3211.8 3420.96,-3299.96 3486,-3365 3486,-3434 ; 3420.96,-2566.13 3420.96,-2741.96 3455,-2776 v1@3455,-2853 ; 3437,3182 3514,3182 3534,3202 3534,3282 ; 3441,3136 3437,3132 ; v1(3460,2814) 3460,2942 ; 3460,2960 3437,2983 3437,3132 ; 3486,-4864 3629,-4864 3658.68,-4893.68 3722.68,-4893.68 ; 3486,-3364 3629,-3364 3658.68,-3393.68 3722.68,-3393.68 ; 3499.7,-4066.13 3499.7,-4215.7 3525,-4241 v1(3525,-4354) ; 3499.7,-2566.13 3499.7,-2715.7 3525,-2741 v1(3525,-2854) ; v1(3538,626) 3562,650 3562,805 ; v1(3538,1641) 3562,1665 3562,1820 ; 3542,2353 3542,2502 3542,2626 3573,2657 3680,2657 v4(3735,2602) ; 3568,3410 3534,3376 3534,3282 ; v1(3578,-4179) 3578,-4066.57 3578.44,-4066.13 ; v1(3578,-2679) 3578,-2566.57 3578.44,-2566.13 ; 3578.44,-4711.8 3579,-4712.35 ; 3578.44,-3211.8 3579,-3212.35 ; v1(3601,2585) 3642,2544 3642,2452 ; v1(3614,2894) 3654,2894 3672,2912 3672,3022 3733,3083 3733,3164 3715,3182 3642,3182 ; v1(3641,200) v1(3641,404) ; v1(3641,1215) v1(3641,1419) ; 3642,2202 3722,2202 3842,2082 ; 3642,2292 3642,2362 3702,2362 3722,2382 v1(3722,2416) ; 3642,3232 3742,3232 ; 3642,3282 3534,3282 ; 3660,3413 3742,3331 3742,3232 ; 3662,3422 3662,3522 ; 3772,3002 3772,3202 3742,3232 ; 3812.68,-4893.68 3866.68,-4893.68 3886,-4913 3886,-5054 ; 3812.68,-3393.68 3866.68,-3393.68 3886,-3413 3886,-3554 ; v1(3828,2872) 3862,2906 3862,3002 ; 3848.94,-6021.73 3993.27,-6021.73 v1(4050,-5965) ; 3848.94,-5911.73 3978.27,-5911.73 v1(4050,-5840) ; 3848.94,-5801.73 3849.2,-5802 v1(3945,-5802) 3987,-5760 v1(4065,-5760) ; v1(3898,-4819) 3921.32,-4795.68 4224.68,-4795.68 4262.68,-4833.68 4262.68,-4942.68 4296.68,-4976.68 ; v1(3898,-3319) 3921.32,-3295.68 4224.68,-3295.68 4262.68,-3333.68 4262.68,-3442.68 4296.68,-3476.68 ; v1(3992,-4965) 4061.36,-4965 ; v1(3992,-3465) 4061.36,-3465 ; v1(4058,-4638) 4058,-4505 4094,-4469 4136,-4469 ; v1(4058,-3138) 4058,-3005 4094,-2969 4136,-2969 ; v2(4082,-4265) 4176,-4265 ; v2(4082,-2765) 4176,-2765 ; 4082.68,-5053.68 4143,-5114 4206,-5114 ; 4082.68,-3553.68 4143,-3614 4206,-3614 ; 4136,-4674 4136,-4600 4160,-4576 4300,-4576 v2(4503,-4779) 4546,-4822 4546,-4994 ; 4136,-3174 4136,-3100 4160,-3076 4300,-3076 v2(4503,-3279) 4546,-3322 4546,-3494 ; 4186,-4795.68 4186,-4674 ; 4186,-3295.68 4186,-3174 ; v1(4200,-4355) 4236,-4391 4236,-4469 ; v1(4200,-2855) 4236,-2891 4236,-2969 ; 4236,-4674 4236,-4749 4307.68,-4820.68 4307.68,-4873.68 ; 4236,-3174 4236,-3249 4307.68,-3320.68 4307.68,-3373.68 ; 4266,-4265 4266,-4335 4286,-4355 4286,-4469 ; 4266,-2765 4266,-2835 4286,-2855 4286,-2969 ; 4286,-4674 4286,-4707 4378,-4799 4420,-4799 4476,-4855 ; 4286,-3174 4286,-3207 4378,-3299 4420,-3299 4476,-3355 ; v1(4412,-4598) 4550,-4598 4606,-4654 4726,-4654 ; v1(4412,-3098) 4550,-3098 4606,-3154 4726,-3154 ; 4482.68,-4885.68 4482.68,-4873.68 4482.68,-4927.68 4501,-4946 4501,-5036 4579.32,-5114.32 4805.32,-5114.32 ; 4482.68,-3385.68 4482.68,-3373.68 4482.68,-3427.68 4501,-3446 4501,-3536 4579.32,-3614.32 4805.32,-3614.32 ; 4528.94,-6021.73 4673.27,-6021.73 v1(4730,-5965) ; 4528.94,-5911.73 4658.27,-5911.73 v1(4730,-5840) ; 4528.94,-5801.73 4529.2,-5802 v1(4625,-5802) 4667,-5760 v1(4745,-5760) ; 5088.94,-5106.73 5233.27,-5106.73 v1(5290,-5050) ; 5088.94,-4996.73 5218.27,-4996.73 v1(5290,-4925) ; 5088.94,-4886.73 5089.2,-4887 v1(5185,-4887) 5227,-4845 v1(5305,-4845) ; 5208.94,-6021.73 5353.27,-6021.73 v1(5410,-5965) ; 5208.94,-5911.73 5338.27,-5911.73 v1(5410,-5840) ; 5208.94,-5801.73 5209.2,-5802 v1(5305,-5802) 5347,-5760 v1(5425,-5760) ; 5686.13,-4134 5769,-4134 v1(5809,-4174) 5809,-3922 5784.78,-3897.78 5686.13,-3897.78 ; 5686.13,-3819.04 5861.96,-3819.04 5896,-3785 v1@5973,-3785 ; 5686.13,-3740.3 5835.7,-3740.3 5861,-3715 v1(5974,-3715) ; 5686.13,-3661.56 5686.57,-3662 v1(5799,-3662) ; 5728.94,-5106.73 5873.27,-5106.73 v1(5930,-5050) ; 5728.94,-4996.73 5858.27,-4996.73 v1(5930,-4925) ; 5728.94,-4886.73 5729.2,-4887 v1(5825,-4887) 5867,-4845 v1(5945,-4845) ; 5878.94,-6021.73 6023.27,-6021.73 v1(6080,-5965) ; 5878.94,-5911.73 6008.27,-5911.73 v1(6080,-5840) ; 5878.94,-5801.73 5879.2,-5802 v1(5975,-5802) 6017,-5760 v1(6095,-5760) ; v2(5885,-3158) 5885,-3064 ; 5885,-2974 5955,-2974 5975,-2954 6089,-2954 ; v1(5975,-3040) 6011,-3004 6089,-3004 ; 6089,-3104 6089,-3146 6125,-3182 v1(6258,-3182) ; v1(6218,-2828) 6218,-2690 6274,-2634 6274,-2514 ; v1(6235,-3702) 6236,-3702 6236,-3875 6258.78,-3897.78 6331.8,-3897.78 ; 6294,-3104 6220,-3104 6196,-3080 6196,-2940 v2(6399,-2737) 6442,-2694 6614,-2694 ; 6294,-3054 6415.68,-3054 ; 6294,-3004 6369,-3004 6440.68,-2932.32 6493.68,-2932.32 ; 6294,-2954 6327,-2954 6419,-2862 6419,-2820 6475,-2764 ; 6331.8,-4134 6458,-4134 6554,-4038 6554,-3954 ; 6331.8,-4055.26 6452.74,-4055.26 6488,-4020 6488,-3920 6554,-3854 ; 6331.8,-3976.52 6333.31,-3975 6415,-3975 v1(6434,-3994) ; 6331.8,-3819.04 6419.96,-3819.04 6485,-3754 6554,-3754 ; 6331.8,-3661.56 6332.35,-3661 ; 6363.94,-5106.73 6508.27,-5106.73 v1(6565,-5050) ; 6363.94,-4996.73 6493.27,-4996.73 v1(6565,-4925) ; 6363.94,-4886.73 6364.2,-4887 v1(6460,-4887) 6502,-4845 v1(6580,-4845) ; v1(6439,-3342) 6415.68,-3318.68 6415.68,-3015.32 6453.68,-2977.32 6562.68,-2977.32 6596.68,-2943.32 ; 6484,-3754 6484,-3611 6513.68,-3581.32 6513.68,-3517.32 ; 6505.68,-2757.32 6493.68,-2757.32 6547.68,-2757.32 6566,-2739 6656,-2739 6734.32,-2660.68 6734.32,-2434.68 ; 6513.68,-3427.32 6513.68,-3373.32 6533,-3354 6674,-3354 ; v1(6585,-3248) 6585,-3178.64 ; 6673.68,-3157.32 6734,-3097 6734,-3034
  Bottom Layer w25: 812.72,1383.69 812.72,1491.17 ; 812.72,3746.69 812.72,3854.17 ; 960,1113 v2(1064,1217) ; 960,3476 v2(1064,3580) ; 1025,355 1038,355 ; 1025,2718 1038,2718 ; 1027.28,1383.69 1027.28,1491.17 ; 1027.28,3746.69 1027.28,3854.17 ; 1639.68,1378.68 1639.68,1404 ; 1639.68,3741.69 1639.68,3767 ; 2445.83,2809.72 2553.31,2809.72 ; 2445.83,3024.28 2553.31,3024.28 ; 2533,3636.69 2558.31,3636.69 ; v2(2720,3061) 2824,2957 ; v2(3199,-3941) 3625,-3941 3657.18,-3973.18 3657.18,-4066.13 ; v2(3199,-2441) 3625,-2441 3657.18,-2473.18 3657.18,-2566.13 ; 3263.48,-4066.13 3263.48,-3948.52 ; 3263.48,-2566.13 3263.48,-2448.52 ; 3505,-5635 3545,-5595 3545,-5440 ; v2(3579,-4810) 3579,-4712.35 ; v2(3579,-3310) 3579,-3212.35 ; 3582,3022 3582,3035 ; 3946,-4285 v2(4050,-4181) ; 3946,-2785 v2(4050,-2681) ; 4013.28,-4014.31 4013.28,-3906.83 ; 4013.28,-2514.31 4013.28,-2406.83 ; 4108.35,-4873.68 4217.68,-4873.68 ; 4108.35,-3373.68 4217.68,-3373.68 ; 4185,-5635 4225,-5595 4225,-5440 ; 4264,-4265 4396,-4265 ; 4264,-2765 4396,-2765 ; 4307.68,-4873.68 4392.68,-4873.68 ; 4307.68,-3373.68 4392.68,-3373.68 ; v2(4503,-4779) 4503,-4678.73 ; v2(4503,-3279) 4503,-3178.73 ; 4506,-4534 v3@4506,-4393 ; 4506,-3034 v3@4506,-2893 ; 4865,-5635 4905,-5595 4905,-5440 ; 5425,-4720 5465,-4680 5465,-4525 ; 5526.83,-3226.72 5634.31,-3226.72 ; 5545,-5635 5585,-5595 5585,-5440 ; v2(5561,-4041) 5561,-3615 5593.18,-3582.82 5686.13,-3582.82 ; 5568.52,-3976.52 5686.13,-3976.52 ; v2(5801,-3190) 5905,-3294 ; 5885,-2976 5885,-2844 ; v3@6013,-2734 6154,-2734 ; 6065,-4720 6105,-4680 6105,-4525 ; 6215,-5635 6255,-5595 6255,-5440 ; 6298.73,-2737 v2(6399,-2737) ; 6332.35,-3661 v2(6430,-3661) ; 6493.68,-3131.65 6493.68,-3022.32 ; 6493.68,-2932.32 6493.68,-2847.32 ; 6700,-4720 6740,-4680 6740,-4525
  Bottom Layer w30: 277.48,1331.87 277.48,1252.48 265,1240 v2(265,1192) 381,1076 v2(381,989) ; 277.48,3694.87 277.48,3615.48 265,3603 v2(265,3555) 381,3439 v2(381,3352) ; 960,766 960,812 ; 960,3129 960,3175 ; 1003,735 v2(1055,735) ; 1003,3098 v2(1055,3098) ; 1364.09,1404 1364.09,1294.91 1395,1264 1395,1215 ; 1364.09,3767 1364.09,3657.91 1395,3627 1395,3578 ; 2533,3361.09 2642.09,3361.09 2673,3392 2722,3392 ; 2605.13,2274.48 2684.52,2274.48 2697,2262 v2(2745,2262) 2861,2378 v2(2948,2378) ; 3125,2957 3171,2957 ; 3202,3000 v2(3202,3052) ; v2(3841,-4639) 3925,-4639 ; v2(3841,-3139) 3925,-3139 ; 4061.36,-4965 4062.68,-4963.68 ; 4061.36,-3465 4062.68,-3463.68 ; 4623,-4401 4846,-4401 4846,-4927 4819,-4954 4726,-4954 ; 4623,-2901 4846,-2901 4846,-3427 4819,-3454 4726,-3454 ; 6021,-2617 6021,-2394 6547,-2394 6574,-2421 6574,-2514 ; v2(6259,-3399) 6259,-3315 ; 6583.68,-3177.32 6585,-3178.64
  Bottom Layer w35: 812.72,1491.17 1027.28,1491.17 ; 812.72,3854.17 1027.28,3854.17 ; 824.53,1371.87 1015.47,1371.87 ; 824.53,3734.87 1015.47,3734.87 ; 2445.83,2809.72 2445.83,3024.28 ; 2565.13,2821.53 2565.13,3012.47 ; 3798.72,-3906.83 4013.28,-3906.83 ; 3798.72,-2406.83 4013.28,-2406.83 ; 3810.53,-4026.13 4001.47,-4026.13 ; 3810.53,-2526.13 4001.47,-2526.13 ; 5526.83,-3441.28 5526.83,-3226.72 ; 5646.13,-3429.47 5646.13,-3238.53
  Bottom Layer w40: v2(381,989) 606,989 653,1036 653,1228 671.18,1246.18 671.18,1331.87 737.13,1331.87 791,1278 1168,1278 1305,1141 1305,1035 1305,931 1273,899 1273,749 v2(1307,715) ; v2(381,3352) 606,3352 653,3399 653,3591 671.18,3609.18 671.18,3694.87 737.13,3694.87 791,3641 1168,3641 1305,3504 1305,3398 1305,3294 1273,3262 1273,3112 v2(1307,3078) ; 592.44,686.2 671.18,686.2 ; 592.44,3049.2 671.18,3049.2 ; v2@655,523 731,523 776,568 776,645 857,726 v2(857,942) 857,1274 ; v2@655,2886 731,2886 776,2931 776,3008 857,3089 v2(857,3305) 857,3637 ; 1364.09,1404 1383.09,1423 v2(1540,1423) ; 1364.09,3767 1383.09,3786 v2(1540,3786) ; 1768,1014 1768,754 1865,657 ; 1768,3377 1768,3117 1865,3020 ; v2(2514,3537) 2514,3380.09 2533,3361.09 ; 2663,2854 v2(2995,2854) 3211,2854 3292,2773 3369,2773 3414,2728 v2@3414,2652 ; 2923,3765 3183,3765 3280,3862 ; v2(2948,2378) 2948,2603 2901,2650 2709,2650 2690.82,2668.18 2605.13,2668.18 2605.13,2734.13 2659,2788 2659,3165 2796,3302 2902,3302 3006,3302 3038,3270 3188,3270 v2(3222,3304) ; 3250.8,2589.44 3250.8,2668.18 ; v2(3367,-4409) 3407,-4449 3552,-4449 3639,-4362 3639,-4170 3657.18,-4151.82 3657.18,-4066.13 3715.13,-4066.13 3769,-4120 4344,-4120 4420,-4196 ; v2(3367,-2909) 3407,-2949 3552,-2949 3639,-2862 3639,-2670 3657.18,-2651.82 3657.18,-2566.13 3715.13,-2566.13 3769,-2620 4344,-2620 4420,-2696 ; 3578.44,-4711.8 3657.18,-4711.8 ; 3578.44,-3211.8 3657.18,-3211.8 ; 4350.09,-3994 4369.09,-3975 v2(4526,-3975) ; 4350.09,-2494 4369.09,-2475 v2(4526,-2475) ; 4664.69,-4033 4710,-4033 4809,-3934 ; 4664.69,-2533 4710,-2533 4809,-2434 ; 5554,-2431 5653,-2530 5653,-2575.32 ; v2(5595,-2714) 5595,-2870.91 5614,-2889.91 ; 5816,-2820 5740,-2896 5740,-3471 5686.13,-3524.87 5686.13,-3582.82 5771.82,-3582.82 5790,-3601 5982,-3601 6069,-3688 6069,-3833 v2(6029,-3873) ; 6331.8,-3661.56 6331.8,-3582.82
  Bottom Layer w50: 1305,1035 v3@1649,1035 ; 1305,3398 v3@1649,3398 ; 2902,3302 v3@2902,3646
  other v1: 2287,39 2967,39 3641,39 2287,1054 2967,1054 3641,1054
  other v2: 1441,89 1049,432 1441,488 515,569 912,649 43,685 381,845 1514,939 43,1005 1556,1295 43,1325 539,1533 1508,1533 2612,2040 2932,2040 3252,2040 3092,2378 1441,2452 3368,2512 2404,2536 1049,2795 1441,2851 3288,2909 515,2932 912,3012 3505,3046 43,3048 381,3208 1514,3302 43,3368 3449,3438 3848,3438 2404,3505 2998,3511 2642,3553 1556,3658 43,3688 539,3896 1508,3896
  other v3: 4503.95,-4412.11 4468.52,-4356.99 4531.51,-4356.99 4468.52,-4294 4468.52,-4231.01 4531.51,-4231.01 4503.95,-4175.89 4503.95,-2912.11 4468.52,-2856.99 4531.51,-2856.99 4468.52,-2794 5851.01,-2771.48 5914,-2771.48 5976.99,-2771.48 5795.89,-2736.05 6032.11,-2736.05 4468.52,-2731.01 4531.51,-2731.01 5851.01,-2708.49 5976.99,-2708.49 4503.95,-2675.89 1702.95,976.89 1667.52,1032.01 1730.51,1032.01 1667.52,1095 1730.51,1095 1667.52,1157.99 1730.51,1157.99 1702.95,1213.11 1702.95,3339.89 1667.52,3395.01 1730.51,3395.01 1667.52,3458 1730.51,3458 1667.52,3520.99 1730.51,3520.99 1702.95,3576.11 2779.01,3664.52 2842,3664.52 2904.99,3664.52 2723.89,3699.95 2960.11,3699.95 2779.01,3727.51 2842,3727.51 2904.99,3727.51
  other v4: 3686,-5110 3686,-3610 6730,-3554 505,75 505,2438 3862,2502

## Polygon pours and split planes (outlines as drawn)
no net on Top Layer "Bottom Layer-No Net" (solid, pour order 1000): 2985,-2323 4927,-2323 4927,-3685 2985,-3685 2985,-2323
no net on Top Layer "Bottom Layer-No Net" (solid, pour order 1000): 2985,-3823 4927,-3823 4927,-5185 2985,-5185 2985,-3823
no net on Top Layer "Bottom Layer-No Net" (solid, pour order 1000): 5443,-4255 5443,-2313 6805,-2313 6805,-4255 5443,-4255
no net on Top Layer "Bottom Layer-No Net" (solid, pour order 1000): 0,3938 1940,3938 1940,2363 0,2363 0,3938
no net on Top Layer "Bottom Layer-No Net" (solid, pour order 1000): 0,1575 1940,1575 1940,0 0,0 0,1575
no net on Top Layer "Bottom Layer-No Net" (solid, pour order 1000): 2362,1997 2362,3937 3937,3937 3937,1997 2362,1997
no net on Bottom Layer "Bottom Layer-No Net" (solid, pour order 1000): 3045,-6120 3045,-5340 3645,-5340 3645,-6120 3045,-6120
no net on Bottom Layer "Bottom Layer-No Net" (solid, pour order 1001): 3725,-6120 3725,-5340 4325,-5340 4325,-6120 3725,-6120
no net on Bottom Layer "Bottom Layer-No Net" (solid, pour order 1002): 5085,-6120 5085,-5340 5685,-5340 5685,-6120 5085,-6120
no net on Bottom Layer "Bottom Layer-No Net" (solid, pour order 1003): 4405,-6120 4405,-5340 5005,-5340 5005,-6120 4405,-6120
no net on Bottom Layer "Bottom Layer-No Net" (solid, pour order 1004): 5755,-6120 5755,-5340 6355,-5340 6355,-6120 5755,-6120
no net on Bottom Layer "Bottom Layer-No Net" (solid, pour order 1005): 6240,-5205 6240,-4425 6840,-4425 6840,-5205 6240,-5205
no net on Bottom Layer "Bottom Layer-No Net" (solid, pour order 1006): 4965,-5205 4965,-4425 5565,-4425 5565,-5205 4965,-5205
no net on Bottom Layer "Bottom Layer-No Net" (solid, pour order 1007): 5605,-5205 5605,-4425 6205,-4425 6205,-5205 5605,-5205
no net on Bottom Layer "Bottom Layer-No Net" (solid, pour order 1000): 0,3938 1940,3938 1940,2363 0,2363 0,3938
no net on Bottom Layer "Bottom Layer-No Net" (solid, pour order 1000): 0,1575 1940,1575 1940,0 0,0 0,1575
no net on Bottom Layer "Bottom Layer-No Net" (solid, pour order 1000): 2362,1997 2362,3937 3937,3937 3937,1997 2362,1997
no net on Bottom Layer "Bottom Layer-No Net" (solid, pour order 1000): 3387,0 3387,875 3937,875 3937,0 3387,0
no net on Bottom Layer "Bottom Layer-No Net" (solid, pour order 1000): 2713,0 2713,875 3263,875 3263,0 2713,0
no net on Bottom Layer "Bottom Layer-No Net" (solid, pour order 1000): 2033,0 2033,875 2583,875 2583,0 2033,0
no net on Bottom Layer "Bottom Layer-No Net" (solid, pour order 1000): 2033,1015 2033,1890 2583,1890 2583,1015 2033,1015
no net on Bottom Layer "Bottom Layer-No Net" (solid, pour order 1000): 2713,1015 2713,1890 3263,1890 3263,1015 2713,1015
no net on Bottom Layer "Bottom Layer-No Net" (solid, pour order 1000): 3387,1015 3387,1890 3937,1890 3937,1015 3387,1015